# Altium PCB manette.PCBDOC
Units mm, origin at the board's own origin, x right, y up, seen from the top; angles counter-clockwise.
Board outline 299.72 x 199.9 mm, 2 copper layers (Top Layer, Bottom Layer); 25 components, 30 nets, 109 pads, 13 vias.
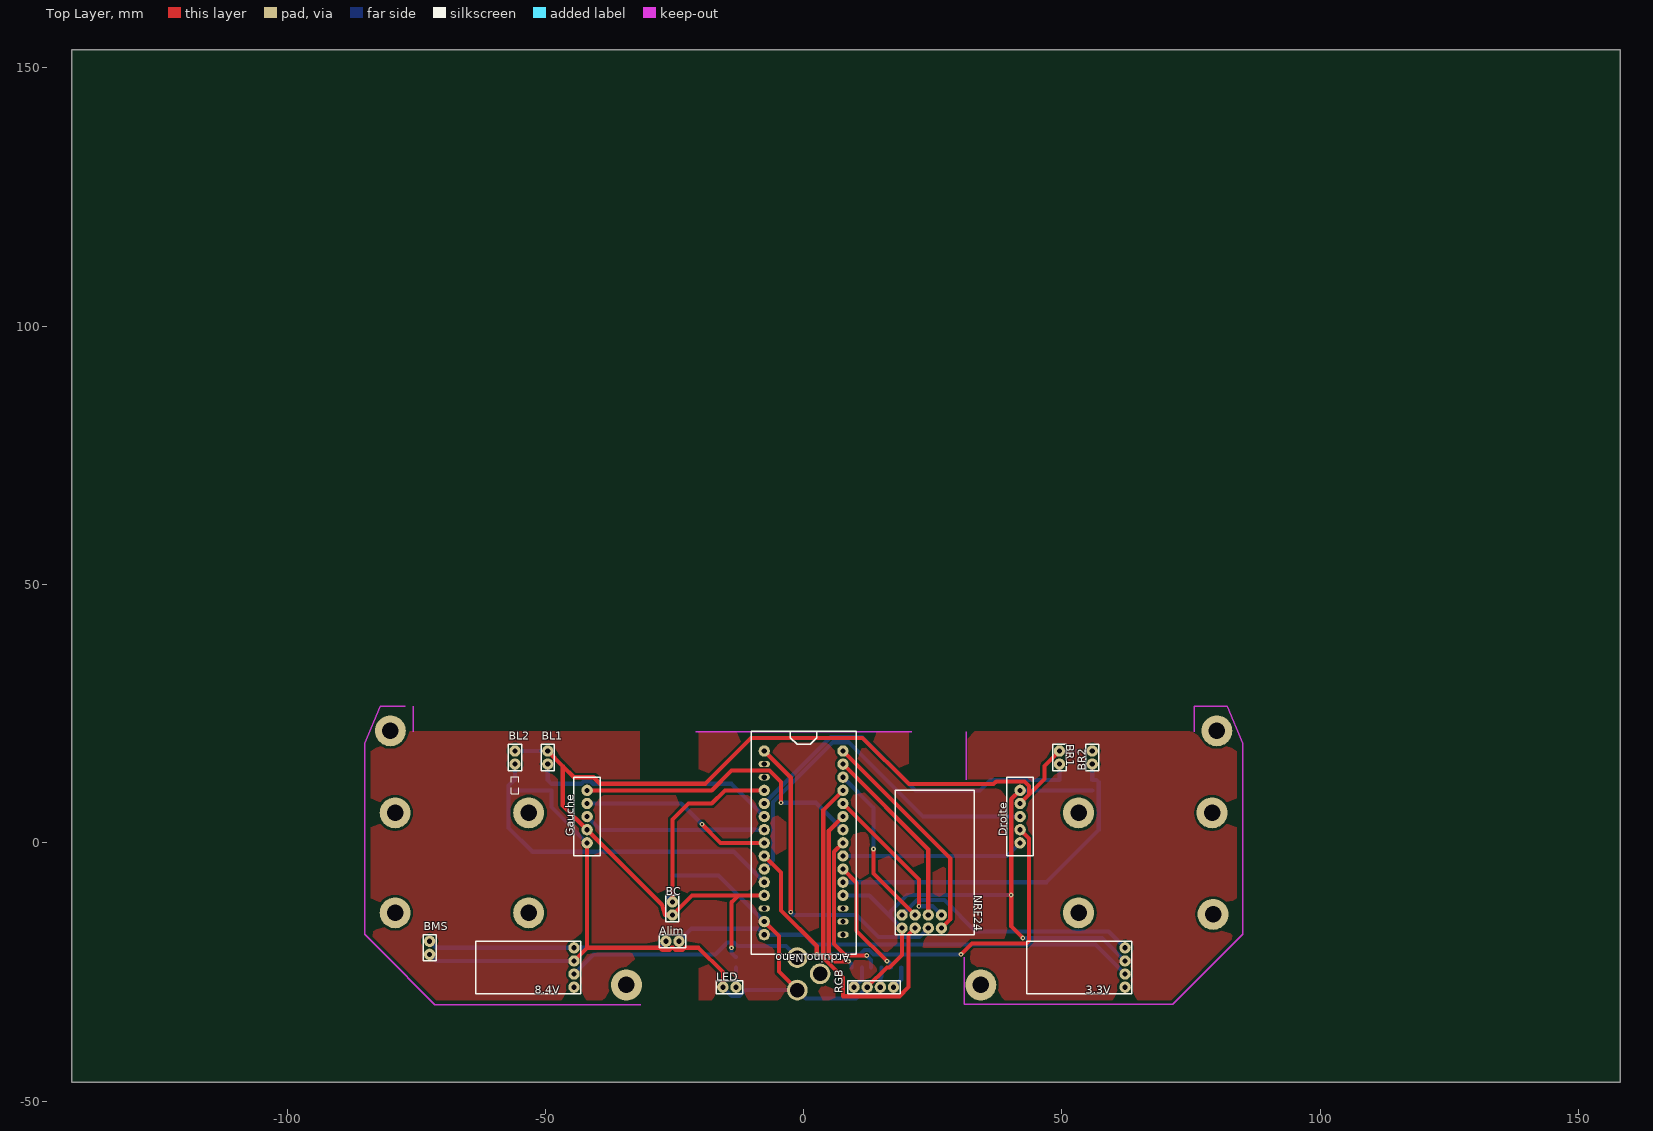
[diagram p0: Top Layer view]
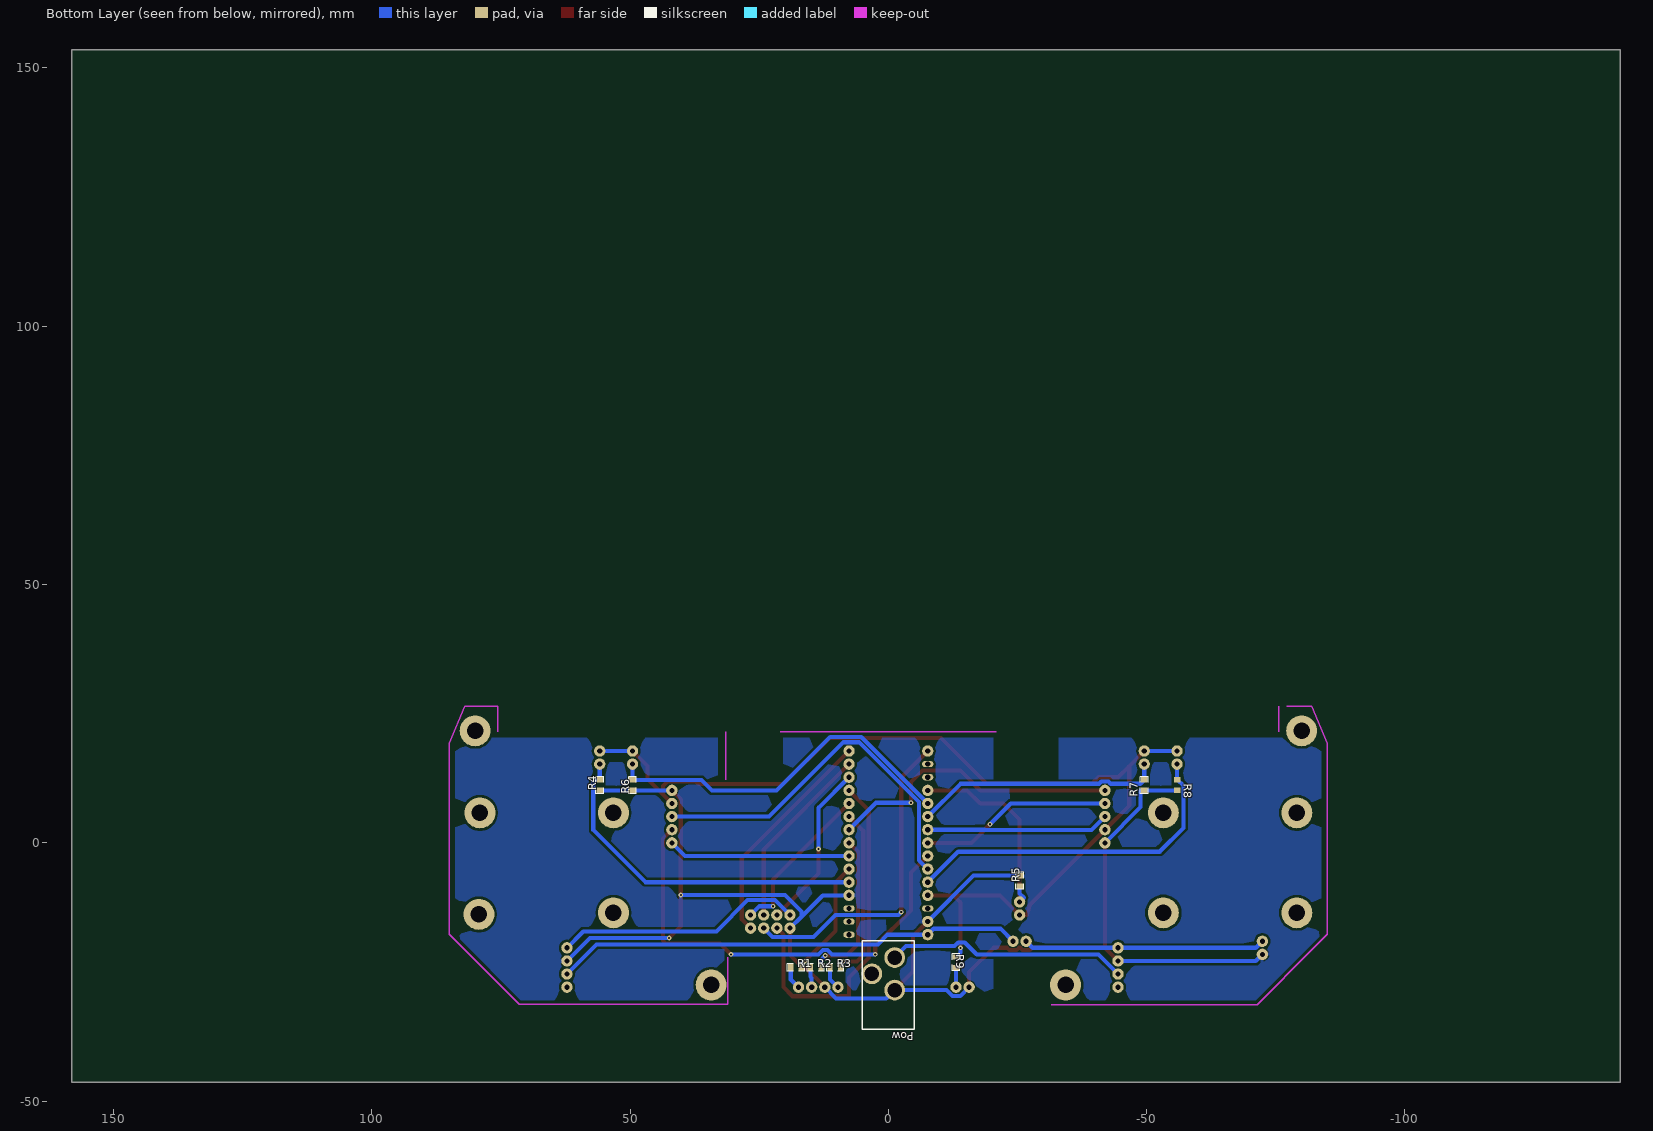
[diagram p1: Bottom Layer view, seen from below]

## Layer stack, top to bottom
Top Solder: solder mask 0.0102, Solder Resist, Dk 3.5
Top Layer: signal copper 0.0356
Dielectric1: dielectric 0.32, FR-4, Dk 4.8
Bottom Layer: signal copper 0.0356
Bottom Solder: solder mask 0.0102, Solder Resist, Dk 3.5

## Board outline
-141.655,-46.39 158.065,-46.39 158.065,153.508 -141.655,153.508

## Design rules (kind name [scope] priority, off if disabled: settings)
Clearance Clearance_bottom_polygon [OnLayer('Bottom Layer') Or OnLayer('Multi-Layer') vs OnLayer('Bottom Layer')  And  InPoly] p1: gap=0.508
Clearance Clearance_top_polygon [OnLayer('Top Layer')  Or OnLayer('Multi-Layer') vs OnLayer('Top Layer') And InPoly] p2: gap=0.508
Clearance Clearance_bottom [OnLayer('Bottom Layer') Or OnLayer('Multi-Layer') vs OnLayer('Bottom Layer')  And Not InPoly] p3: gap=0.203
Clearance Clearance_top [OnLayer('Top Layer')  Or OnLayer('Multi-Layer') vs OnLayer('Top Layer') And Not InPoly] p4: gap=0.203
Clearance Clearance_pad_to_pad [OnLayer('Multi-Layer') vs OnLayer('Multi-Layer')] p5: gap=0.254
ComponentClearance ComponentClearance_bottom [OnLayer('Bottom Overlay') vs OnLayer('Bottom Overlay')] p1: gap=0 collisioncheckmode=3 verticalgap=0.254 showdistances=FALSE
ComponentClearance ComponentClearance_top [OnLayer('Top Overlay') vs OnLayer('Top Overlay')] p2: gap=0 collisioncheckmode=3 verticalgap=0.254 showdistances=FALSE
FabricationTestPointUsage TestPointUsage [All] p1: valid=0 allowmultiple=FALSE
FabricationTestpoint Testpoint [All] p1: side=3 testpointundercomponent=TRUE minsize=1.016 maxsize=2.54 preferedsize=1.524 minholesize=0 maxholesize=1.016 preferedholesize=0.813 testpointgrid=0.025 allowsidetop=TRUE allowsidebottom=TRUE usegrid=TRUE gridtolerance=0
HoleSize [All] p1: absolutevalues=TRUE maxlimit=25.4 minlimit=0.406 maxpercent=80.000 minpercent=20.000
MinimumAnnularRing [PadXSize_AllLayers = PadYSize_AllLayers] p1: minimumring=0.254
PermittedLayers [All] p1: toplayerpermitted=TRUE bottomlayerpermitted=TRUE
PolygonConnect [All] p1: connectstyle=Relief reliefconductorwidth=0.61 reliefentries=4 polygonreliefangle="90 Angle" airgapwidth=0.254
RoutingVias [All] p1: holewidth=0.406 width=0.914 viastyle="Through Hole" minholewidth=0.406 minwidth=0.914 maxholewidth=25.4 maxwidth=25.4
SMDNeckDown [All] p1: percent=95.000
SMDToPlane [All] p1: distance=0
SolderMaskExpansion [All] p1: expansion=0.102
ViasUnderSMD [All] p1: allowed=FALSE
Width [All] p1: maxlimit=1 minlimit=0.254 preferedwidth=0.8
Width Width_botom_top [OnLayer('Bottom Layer') or OnLayer('Top Layer')] p2: maxlimit=254 minlimit=0.254 preferedwidth=0.813
26 further rules are at their usual default settings.

## Components (designator, comment, footprint, x,y, rotation, side; value= is the part's Value field where it differs from the comment)
3.3V "Abaisseur" AbaisseurTension 62.23,-27.94 r180 top
8.4V "Abaisseur" AbaisseurTension -44.45,-27.94 r180 top
Alim "PortBouton" PortBouton -24.13,-19.05 r270 top (schematic designator "Alim generale")
"Arduino Nano" "Arduino Nano" "Arduino Nano" 7.62,-17.78 r180 top
BC "PortBouton" PortBouton -25.4,-13.97 r180 top
BL1 "PortBouton" PortBouton -49.53,17.78 r0 top
BL2 "PortBouton" PortBouton -55.88,17.78 r0 top
BMS "PortBouton" PortBouton -72.39,-19.05 r0 top
BR1 "PortBouton" PortBouton 49.53,17.78 r0 top
BR2 "PortBouton" PortBouton 55.88,15.24 r180 top
Droite "Joystick" Joystick 41.91,10.16 r0 top
Gauche "Joystick" Joystick -41.91,0 r180 top
LED "PortBouton" PortBouton -13.09,-27.94 r270 top
NRF24 "NRF24" NRF24 19.05,-16.51 r90 top
Pow "Connecteur Power" "Connecteur Power" 5.08,-19.05 r270 bottom
R1 "RES" 0805#1 16.87,-24.13 r0 bottom
R2 "RES" 0805#1 13.06,-24.13 r0 bottom
R3 "RES" 0805#1 9.25,-24.13 r0 bottom
R4 "RES" 0805#1 55.88,10.16 r90 bottom
R5 "RES" 0805#1 -25.4,-6.35 r270 bottom
R6 "RES" 0805#1 49.53,10.16 r90 bottom
R7 "RES" 0805#1 -49.53,10.16 r90 bottom
R8 "RES" 0805#2 -55.88,10.16 r270 bottom
R9 "RES" 0805#1 -13.09,-24.13 r90 bottom
RGB "Led RGB" "Led RGB" 17.39,-27.94 r180 top

## Footprints (in the part's own frame and the unit in brackets; to place one, negate y for a bottom-side part, rotate by r counter-clockwise, add the part's x,y. Pads: shape width x height; smd on the part's side, far side on the other; paste and mask are expansions set on the pad)
0805#1 [mil]
  rect 40x50 smd: 1(0,0) 2(80,0)
  silkscreen extent -25,-30 105,30
0805#2 [mil]
  rect 40x50 smd: 1(0,0) 2(-80,0)
AbaisseurTension [mm]
  round 2.2 hole 1: 1(0,-7.62) 2(0,-5.08) 3(0,-2.54) 4(0,0)
  silkscreen extent -1.27,-8.89 19.05,1.27
"Arduino Nano" [mm]
  oval 2.2x1.2 hole 1: 1(0,0) 2(0,-2.54) 3(0,-5.08) 18(15.24,-5.08) 28(15.24,-30.48) 29(15.24,-33.02)
  round 2.2 hole 1: 4(0,-7.62) 5(0,-10.16) 6(0,-12.7) 7(0,-15.24) 8(0,-17.78) 9(0,-20.32) 10(0,-22.86) 11(0,-25.4) 12(0,-27.94) 13(0,-30.48) 14(0,-33.02) 15(0,-35.56) 16(15.24,0) 17(15.24,-2.54) 19(15.24,-7.62) 20(15.24,-10.16) 21(15.24,-12.7) 22(15.24,-15.24) 23(15.24,-17.78) 24(15.24,-20.32) 25(15.24,-22.86) 26(15.24,-25.4) 27(15.24,-27.94) 30(15.24,-35.56)
  silkscreen extent -2.54,-39.37 17.78,3.81
"Connecteur Power" [mm]
  round 4 hole 2.8: 0(3.15,6.3) 1(9.45,6.3) 2(6.3,1.89)
  silkscreen extent -0.13,0 17.01,10.08
Joystick [mm]
  round 2.2 hole 1: 1(0,0) 2(0,-2.54) 3(0,-5.08) 4(0,-7.62) 5(0,-10.16)
  silkscreen extent -2.54,-12.7 2.54,2.54
"Led RGB" [mm]
  round 2.2 hole 1: 1(0,0) 2(2.54,0) 3(5.08,0) 4(7.62,0)
  silkscreen extent -1.27,-1.27 8.89,1.27
NRF24 [mm]
  round 2.2 hole 1: 1(0,0) 2(2.54,0) 3(0,-2.54) 4(2.54,-2.54) 5(0,-5.08) 6(2.54,-5.08) 7(0,-7.62) 8(2.54,-7.62)
  silkscreen extent -1.27,-13.97 26.67,1.27
PortBouton [mm]
  round 2.2 hole 1: 1(0,0) 2(0,-2.54)
  silkscreen extent -1.27,-3.81 1.27,1.27

## Part data
R1 R2 R3 R4 R5 R6 R7 R8 R9: "resistance"

## Free pads (board coordinates)
  round 6 hole 3.2: 1(-34.3,-27.51) 2(34.3,-27.51) 2(79.07,5.81) 3(-80,21.69) 3(53.22,5.81) 4(79.27,-13.84) 4(80,21.69) 5(53.22,-13.54) 6(-53.22,5.81) 7(-53.22,-13.54) 8(-79.07,5.81) 9(-79.07,-13.54)

## Via types
v1: diameter 0.914, hole 0.406, Top Layer to Bottom Layer, 13 vias

## Nets (pads, with @x,y where several pads share a name; then routed paths per layer and width w, separated by ;. In a path a pad name is that pad's centre, name@x,y a point inside that pad or via, vN(x,y) a via of type N, cw(c..) or ccw(c..) an arc to the next point about the centre after c; other vN are vias at no path point)
"CONVERT 8.4V": 8.4V.1 Alim.2 BMS.1 | length 46.8
  Bottom Layer w0.8: BMS.1 -71.12,-20.32 8.4V.1 -27.94,-20.32 Alim.2
GND: 3.3V.2 8.4V.2 "Arduino Nano.4" "Arduino Nano.17" BMS.2 Droite.1 Gauche.1 LED.2 NRF24.1 Pow.1 R4.1 R5.1 R6.1 R7.1 R8.1 RGB.3 | length 292.5
  Top Layer w0.8: 8.4V.2 -41.91,-20.32 ; Gauche.1 -41.91,-20.32 ; LED.2 -15.63,-25.01 -20.32,-20.32 -22.991,-20.32 -23.424,-20.753 -24.835,-20.753 -25.269,-20.32 -25.531,-20.32 -25.964,-20.753 -27.375,-20.753 -27.809,-20.32 -41.91,-20.32 ; -7.62,-15.24 -4.8,-18.06 -4.8,-24.92 Pow.1 ; RGB.3 16.111,-24.139 16.587,-24.139 19.05,-21.677 NRF24.1 ; Droite.1 40.184,8.434 v1(40.184,-10.095) 40.184,-16.139 v1(42.444,-18.399)
  Bottom Layer w0.8: BMS.2 -71.12,-22.86 8.4V.2 ; R8.1 R7.1 -48.818,10.16 -48.818,6.908 Gauche.1 ; R5.1 -16.51,-6.35 -7.62,-15.24 ; LED.2 -13.919,-29.651 -12.377,-29.651 -11.226,-28.5 Pow.1 0.414,-30.134 10.116,-30.134 RGB.3 ; 7.62,-10.16 12.7,-10.16 16.841,-14.301 ; NRF24.1 16.841,-14.301 ; v1(40.184,-10.095) 20.031,-10.095 16.841,-13.285 16.841,-14.301 ; Droite.1 R6.1 52.68,10.16 R4.1 ; v1(42.444,-18.399) 57.769,-18.399 3.3V.2
Net3.3V_1: 3.3V.1 NRF24.2 | length 48.2
  Bottom Layer w0.8: NRF24.2 21.922,-11.098 27.244,-11.098 33.3,-17.155 59.065,-17.155 3.3V.1
"NetArduino Nano_5": "Arduino Nano.5" BR2.1 R4.2 | length 67.5
  Bottom Layer w0.8: 7.62,-7.62 47.026,-7.62 57.125,2.48 57.125,11.786 56.719,12.192 R4.2 BR2.1
"NetArduino Nano_6": "Arduino Nano.6" R1.1 | length 23
  Top Layer w0.8: 7.62,-5.08 10.262,-7.722 10.262,-17.028 v1(16.13,-22.895)
  Bottom Layer w0.8: v1(16.13,-22.895) 16.333,-22.895 16.87,-23.432 R1.1
"NetArduino Nano_7": "Arduino Nano.7" Droite.5 | length 35.3
  Bottom Layer w0.8: 7.62,-2.54 39.37,-2.54 Droite.5
"NetArduino Nano_8": "Arduino Nano.8" R2.1 | length 30.2
  Top Layer w0.8: 7.62,0 5.894,-1.726 5.894,-19.597 8.099,-21.803 v1(12.218,-21.803)
  Bottom Layer w0.8: v1(12.218,-21.803) 13.06,-22.645 R2.1
"NetArduino Nano_9": "Arduino Nano.9" Gauche.5 | length 58.2
  Top Layer w0.8: Gauche.5 -17.78,10.16 -13.97,13.97 -6.587,13.97 -4.393,11.776 v1(-4.393,7.761)
  Bottom Layer w0.8: v1(-4.393,7.761) 2.399,7.761 7.62,2.54
"NetArduino Nano_10": "Arduino Nano.10" R3.1 | length 33.7
  Top Layer w0.8: 7.62,5.08 4.878,2.338 4.878,-21.744 6.08,-22.946 v1(8.713,-22.946)
  Bottom Layer w0.8: v1(8.713,-22.946) 9.25,-23.483 R3.1
"NetArduino Nano_11": "Arduino Nano.11" NRF24.8 | length 31
  Top Layer w0.8: 7.62,7.62 22.302,-7.062 v1(22.302,-12.267)
  Bottom Layer w0.8: v1(22.302,-12.267) 24.967,-12.267 NRF24.8
"NetArduino Nano_12": "Arduino Nano.12" NRF24.3 | length 68.4
  Top Layer w0.8: 7.62,10.16 3.811,6.351 3.811,-22.289 7.621,-26.099 7.621,-29.699 18.546,-29.699 20.32,-27.925 20.32,-17.78 NRF24.3
"NetArduino Nano_13": "Arduino Nano.13" NRF24.4 | length 32.5
  Top Layer w0.8: v1(13.539,-1.178) 13.539,-5.919 NRF24.4
  Bottom Layer w0.8: 7.62,12.7 13.539,6.781 v1(13.539,-1.178)
"NetArduino Nano_14": "Arduino Nano.14" NRF24.6 | length 36
  Top Layer w0.8: 7.62,15.24 24.13,-1.27 NRF24.6
"NetArduino Nano_15": "Arduino Nano.15" NRF24.7 | length 43.6
  Top Layer w0.8: 7.62,17.78 28.398,-2.998 28.398,-14.782 NRF24.7
"NetArduino Nano_19": "Arduino Nano.19" BC.1 BL1.1 BL2.1 BR1.1 BR2.2 Droite.2 Gauche.2 R9.2 | length 202
  Top Layer w0.8: BL1.1 -46.634,14.884 ; v1(-13.97,-20.32) -13.97,-11.507 -12.623,-10.16 ; -7.62,-10.16 -12.623,-10.16 ; Droite.2 43.638,9.348 ; BR1.1 46.661,14.911 46.661,12.371 43.638,9.348 ; -46.634,14.884 -44.45,12.7 -40.64,12.7 -39.37,11.43 -19.05,11.43 -10.16,20.32 11.43,20.32 20.38,11.37 36.78,11.37 37.288,11.878 42.774,11.878 43.638,11.014 43.638,9.348 ; -46.634,14.884 -46.634,7.264 Gauche.2 -27.384,-11.986 -26.847,-13.97 BC.1 -21.59,-10.16 -12.623,-10.16
  Bottom Layer w0.8: BL2.1 BL1.1 ; v1(-13.97,-20.32) -13.97,-21.284 -13.156,-22.098 R9.2 ; BR1.1 52.68,17.78 BR2.2
"NetArduino Nano_20": "Arduino Nano.20" BL2.2 R8.2 | length 66.8
  Bottom Layer w0.8: BL2.2 -55.88,13.706 R8.2 -56.006,12.192 -57.124,11.074 -57.124,2.886 -52.526,-1.711 -13.529,-1.711 -7.62,-7.62
"NetArduino Nano_21": "Arduino Nano.21" Droite.3 | length 72.3
  Bottom Layer w0.8: -7.62,-5.08 -5.917,-3.377 -5.917,7.904 5.662,19.483 8.713,19.483 23.116,5.08 Droite.3
"NetArduino Nano_22": "Arduino Nano.22" Droite.4 | length 88.4
  Top Layer w0.8: -7.62,-2.54 -4.393,-5.767 -4.393,-13.065 2.54,-19.999 v1(2.54,-21.59) ; v1(30.48,-21.59) 32.579,-19.491 43.105,-19.491 43.638,-18.958 43.638,0.812 Droite.4
  Bottom Layer w0.8: v1(2.54,-21.59) 10.931,-21.59 11.779,-20.742 12.657,-20.742 13.505,-21.59 v1(30.48,-21.59)
"NetArduino Nano_23": "Arduino Nano.23" Gauche.4 | length 37.4
  Top Layer w0.8: v1(-19.659,3.597) -16.062,0 -7.62,0
  Bottom Layer w0.8: Gauche.4 -23.682,7.62 v1(-19.659,3.597)
"NetArduino Nano_24": "Arduino Nano.24" Gauche.3 | length 35.4
  Bottom Layer w0.8: Gauche.3 -39.344,2.514 -18.634,2.514 -18.609,2.54 -7.62,2.54
"NetArduino Nano_25": "Arduino Nano.25" BL1.2 R7.2 | length 48.3
  Bottom Layer w0.8: BL1.2 -49.53,13.706 R7.2 -48.768,11.43 -43.049,11.43 -42.616,11.863 -41.205,11.863 -40.771,11.43 -13.97,11.43 -7.62,5.08
"NetArduino Nano_26": "Arduino Nano.26" BR1.2 R6.2 | length 70.7
  Bottom Layer w0.8: -7.62,7.62 5.246,20.486 11.264,20.486 21.65,10.1 34.113,10.1 36.205,12.192 R6.2 BR1.2
"NetArduino Nano_27": "Arduino Nano.27" BC.2 R5.2 | length 39.8
  Top Layer w0.8: BC.2 -25.4,4.486 -22.266,7.62 -17.78,7.62 -15.24,10.16 -7.62,10.16
  Bottom Layer w0.8: BC.2 -26.212,-10.618 -25.4,-9.806 R5.2
"NetArduino Nano_30": "Arduino Nano.30" NRF24.5 | length 62.6
  Top Layer w0.8: -7.62,17.78 -2.488,12.648 v1(-2.488,-13.421)
  Bottom Layer w0.8: v1(-2.488,-13.421) -1.93,-13.98 10.237,-13.98 14.471,-18.213 22.427,-18.213 NRF24.5
NetLED_1: LED.1 R9.1 | length 3.8
  Bottom Layer w0.8: LED.1 R9.1
NetR1_2: R1.2 RGB.1 | length 4.4
  Bottom Layer w0.8: RGB.1 18.902,-26.428 R1.2
NetR2_2: R2.2 RGB.2 | length 3.9
  Bottom Layer w0.8: RGB.2 14.85,-26.172 15.092,-25.93 R2.2
NetR3_2: R3.2 RGB.4 | length 4.4
  Bottom Layer w0.8: RGB.4 11.282,-26.428 R3.2
"POWERCONNECTOR 9V": 8.4V.3 Pow.0 | length 47
  Bottom Layer w0.8: 8.4V.3 -40.64,-21.59 -17.109,-21.59 -14.779,-19.26 -13.531,-19.26 -12.81,-19.98 -3.44,-19.98 Pow.0
VCC: 3.3V.3 "Arduino Nano.16" Alim.1 | length 91
  Bottom Layer w0.8: Alim.1 -21.701,-16.621 -8.779,-16.621 -7.62,-17.78 0.153,-17.78 2.042,-19.669 56.499,-19.669 3.3V.3
pads on no net: 3.3V.4 8.4V.4 "Arduino Nano.1" "Arduino Nano.2" "Arduino Nano.3" "Arduino Nano.18" "Arduino Nano.28" "Arduino Nano.29" Pow.2

## Polygon pours and split planes (outlines as drawn)
GND on Top Layer "Top GND" (solid, pour order 6): -82.55,26.67 -76.2,26.67 -76.2,21.59 -31.75,21.59 -31.75,11.43 -20.32,11.43 -20.32,21.59 20.32,21.59 20.32,12.7 21.59,11.43 31.75,11.43 31.75,21.59 76.2,21.59 76.2,25.4 81.28,25.4 83.82,22.86 83.82,19.05 83.82,-17.78 71.12,-30.48 31.75,-30.48 31.75,-20.32 20.32,-20.32 20.32,-30.48 -20.32,-30.48 -20.32,-21.59 -31.75,-21.59 -31.75,-30.48 -71.12,-30.48 -83.82,-17.78 -83.82,19.05
GND on Bottom Layer "Top GND" (solid, pour order 8): -81.28,25.4 -76.2,25.4 -76.2,20.32 -33.02,20.32 -33.02,11.43 -20.32,11.43 -20.32,20.32 20.32,20.32 20.32,11.43 33.02,11.43 33.02,20.32 76.2,20.32 82.55,20.32 83.82,19.05 83.82,-17.78 71.12,-30.48 33.02,-30.48 33.02,-24.13 31.75,-22.86 31.75,-20.32 20.32,-20.32 20.32,-29.21 -20.32,-29.21 -20.32,-21.59 -30.48,-21.59 -31.75,-20.32 -31.75,-30.48 -71.12,-30.48 -83.82,-17.78 -83.82,19.05

## Keep-outs
Keep-Out Layer:
  lines w0.254: -77.1,26.49 -82,26.49 -85,19.29 -85,-17.7 -82,-20.7 -71.39,-31.31 -38,-31.31 -31.5,-31.31 ; -75.6,21.49 -75.6,26.49 ; -20.9,21.49 20.9,21.49 ; 31.1,-22.11 31.1,-31.21 38,-31.21 71.49,-31.21 85,-17.7 85,19.29 82,26.49 75.6,26.49 75.6,21.49 ; 31.5,12.19 31.5,21.49

## Silkscreen, mask and mechanical layers (free items; w line width, h text height)
Top Overlay:
  text "Les bandes en violet delimitent la surface utilisable...." at -144.907,179.832 h6.35
  text "Mais vous n'etes pas obliges de tout utiliser!!" at -128.651,169.545 h6.35
Mechanical 1:
  lines w0.254: -20.9,21.49 -20.9,12.09 -31.5,12.09 -31.5,21.49 -75.6,21.49 -75.6,26.49 ; -20.71,21.49 20.9,21.49 ; 20.9,13.19 20.9,21.49 ; -77.1,26.49 -75.6,26.49 ; -77.1,26.49 -82,26.49 -85,19.29 -85,-17.7 -82,-20.7 -71.39,-31.31 -38,-31.31 -31.5,-31.31 -31.5,-22.01 -20.9,-22.01 -20.9,-31.21 20.9,-31.21 20.9,-22.11 31.1,-22.11 31.1,-31.21 38,-31.21 71.49,-31.21 85,-17.7 85,19.29 82,26.49 75.6,26.49 75.6,21.49 31.5,21.49 31.5,12.19 20.9,12.19 20.9,21.49 ; -77.1,26.49 -75.6,26.49